# Altium PCB PCB_Emergencia_Rute.PcbDoc
Units mm, origin at the board's own origin, x right, y up, seen from the top; angles counter-clockwise.
Board outline 64.01 x 70.1 mm, 2 copper layers (Top Layer, Bottom Layer); 72 components, 52 nets, 238 pads, 46 vias.
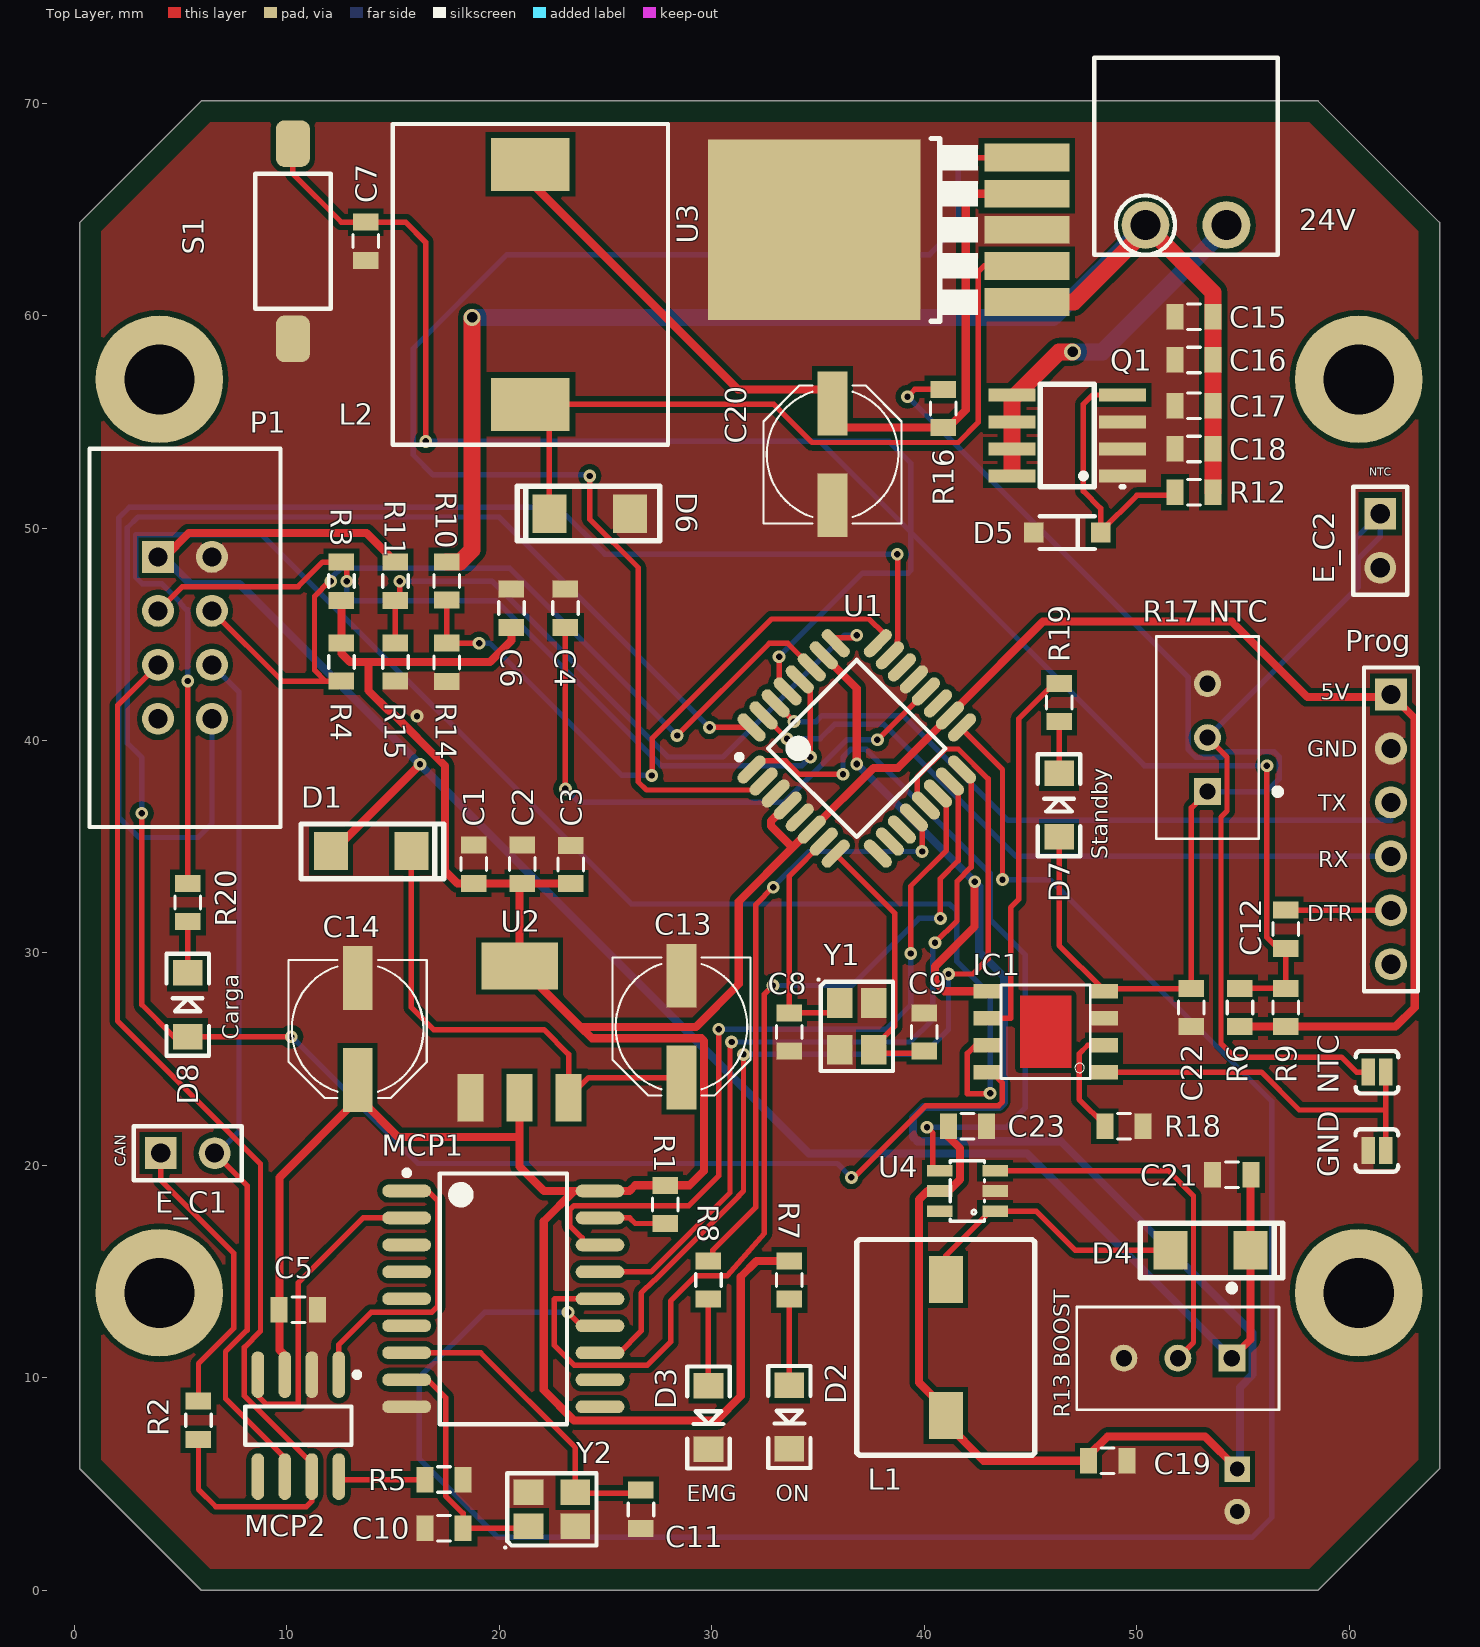
[diagram p0: Top Layer view]
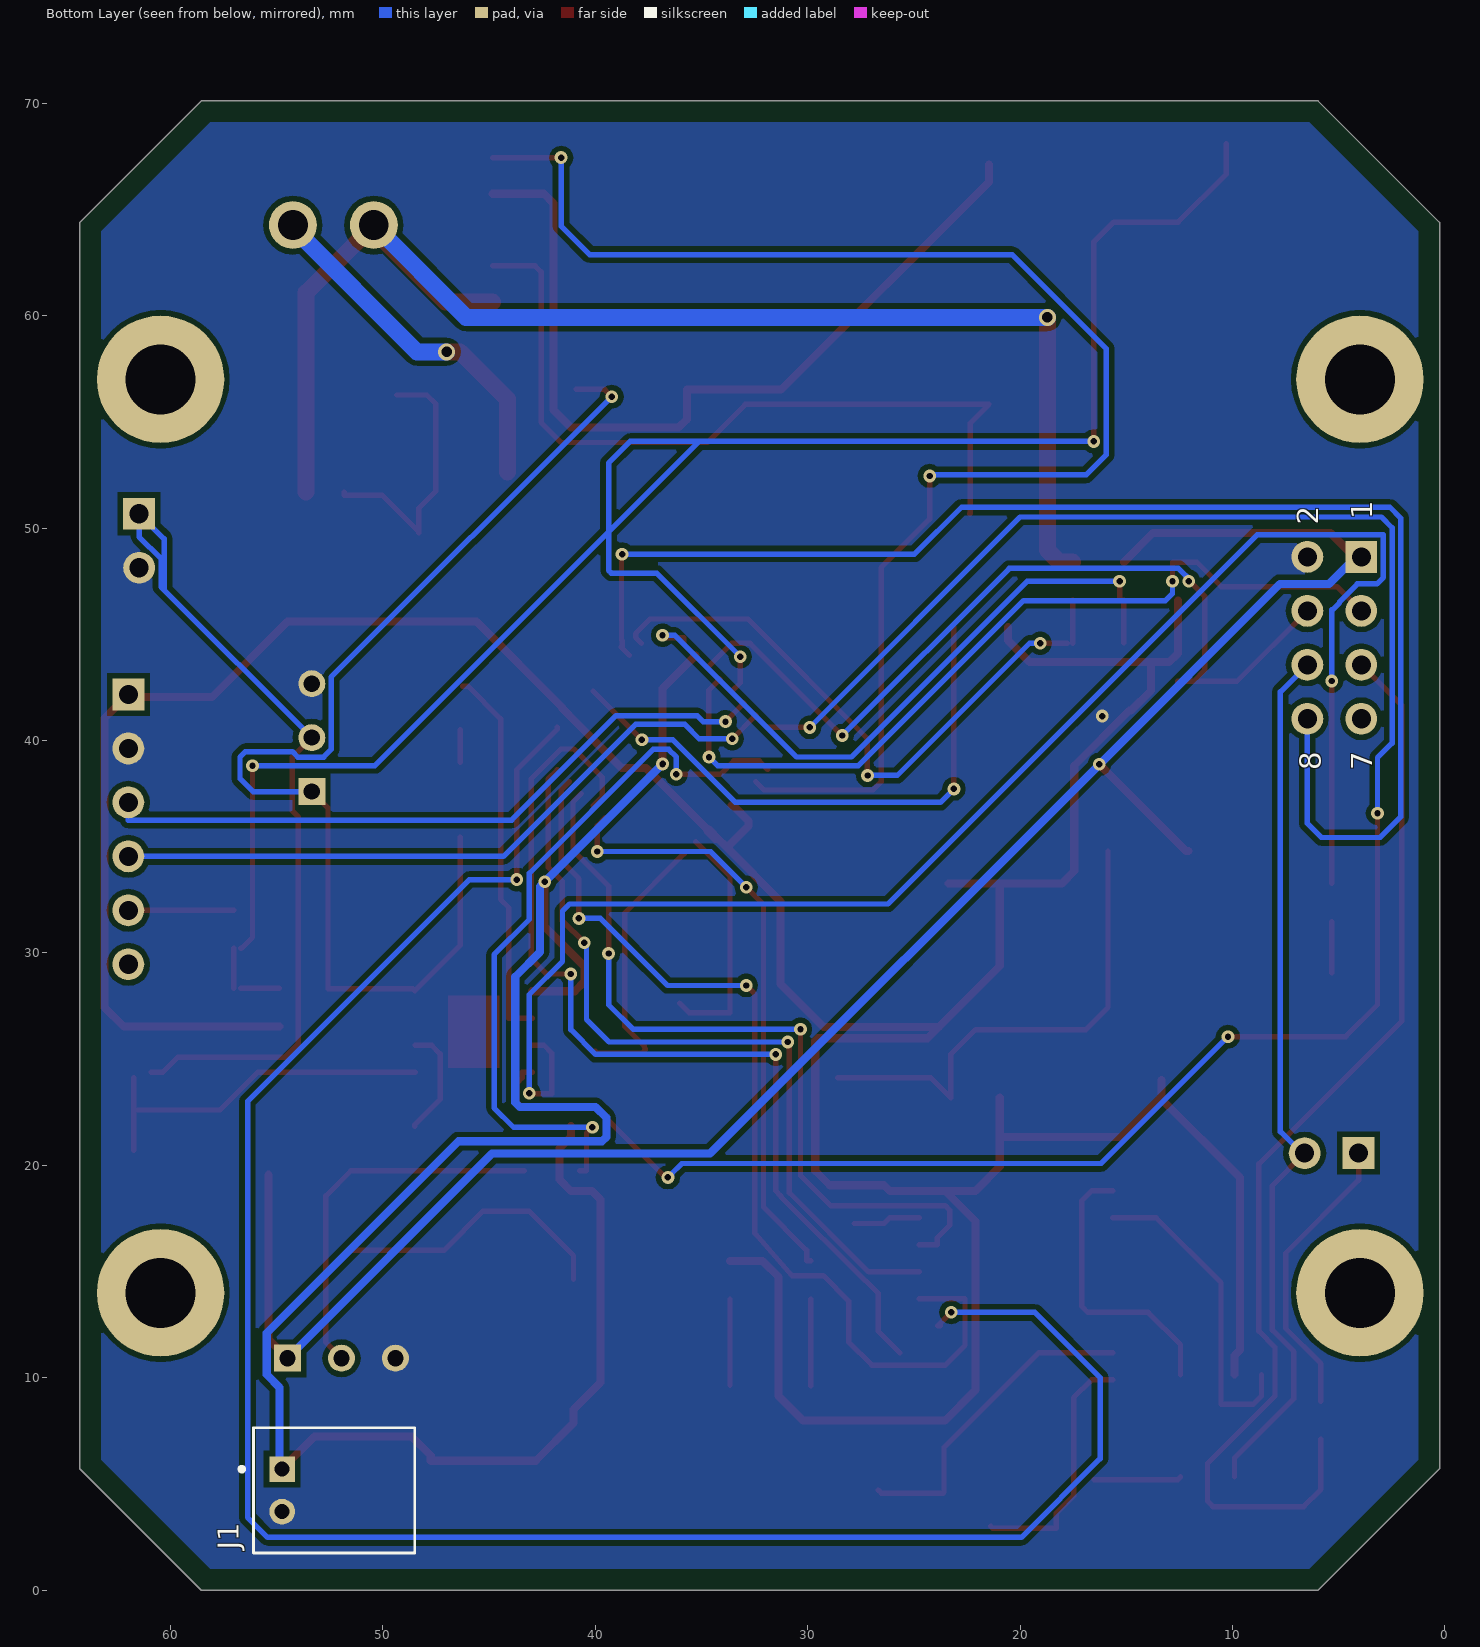
[diagram p1: Bottom Layer view, seen from below]
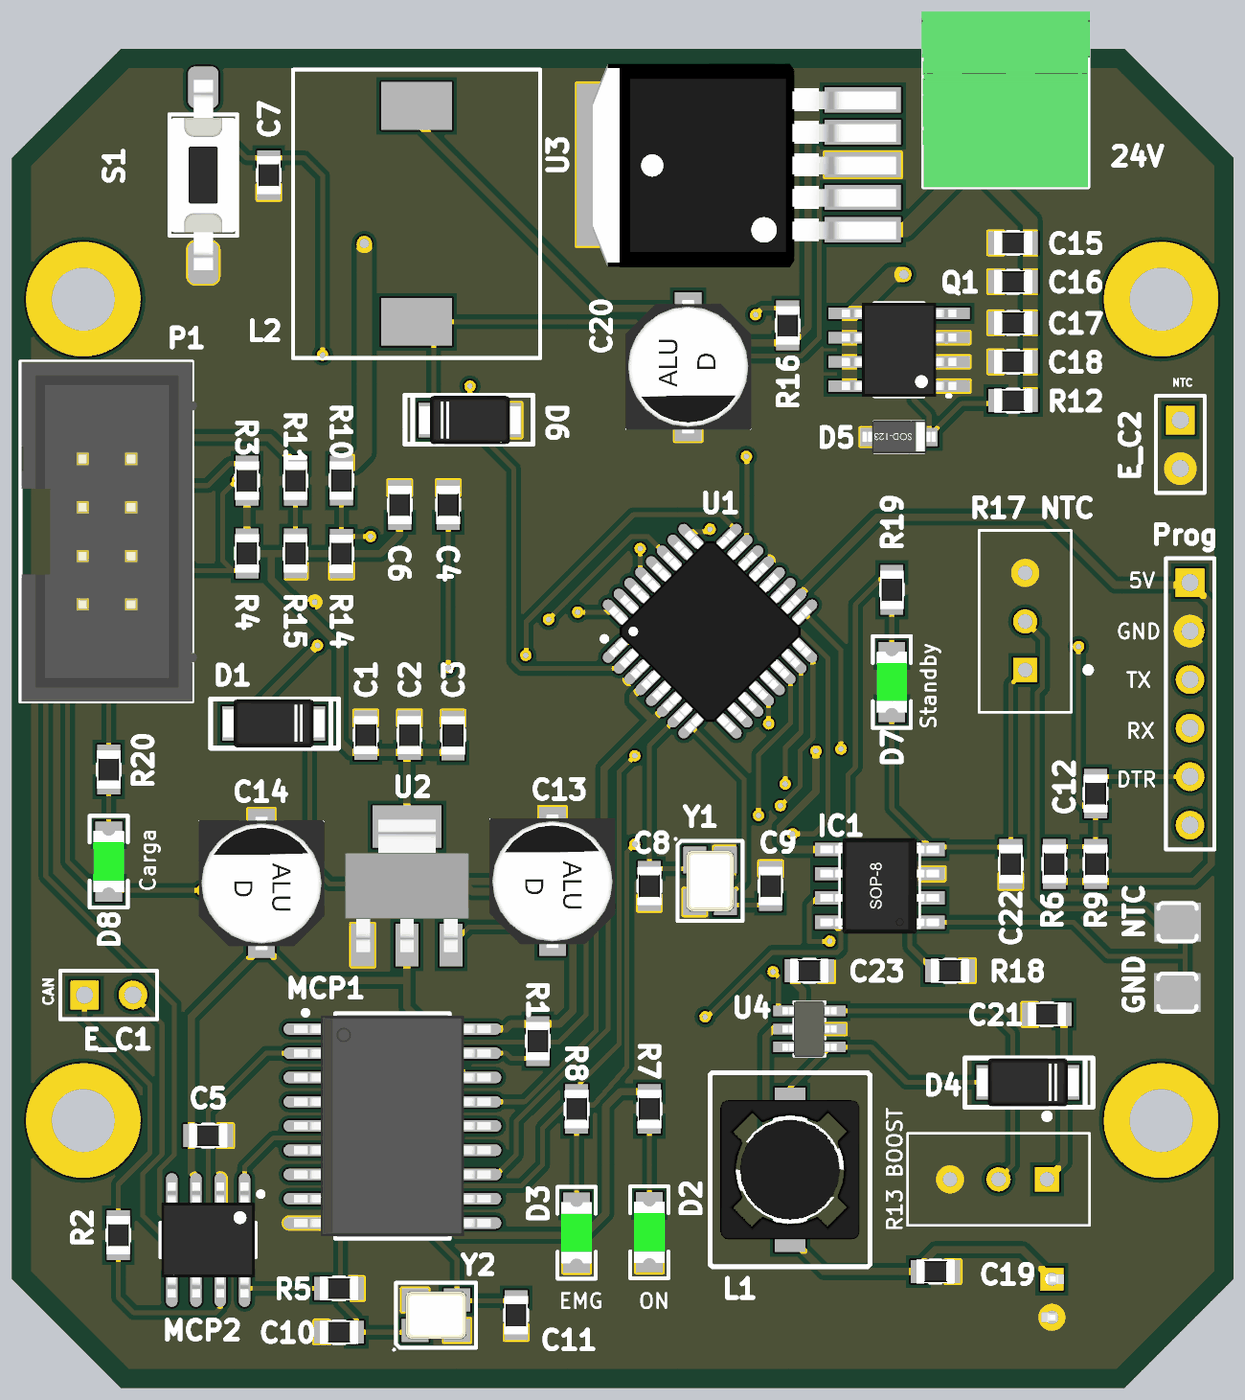
[diagram p2: 3D render of the assembled board from above, using the file's embedded part models]

## Layer stack, top to bottom
Top Solder: solder mask 0.0102, Solder Resist, Dk 3.5
Top Layer: signal copper 0.0356
Dielectric 1: dielectric 0.32, FR-4, Dk 4.8
Bottom Layer: signal copper 0.0356
Bottom Solder: solder mask 0.0102, Solder Resist, Dk 3.5

## Board outline
0.254,5.715 5.969,0 58.547,0 64.262,5.715 64.262,64.389 58.547,70.104 5.969,70.104 0.254,64.389

## Design rules (kind name [scope] priority, off if disabled: settings)
BoardOutlineClearance [All] p1: gap=1 ignorepadtopadclearanceinfootprint=FALSE
Clearance Clearance_2 [InNamedPolygon('GND TOP PLANE')] p1: gap=0.254 ignorepadtopadclearanceinfootprint=FALSE except(0: Arc-Hole Track-Hole SMDPad-Hole THPad-Hole Via-Hole Fill-Hole Poly-Hole Region-Hole Text-Hole)
Clearance Clearance_1 [InNamedPolygon('GND BOTTOM PLANE')] p2: gap=0.254 ignorepadtopadclearanceinfootprint=FALSE except(0: Arc-Hole Track-Hole SMDPad-Hole THPad-Hole Via-Hole Fill-Hole Poly-Hole Region-Hole Text-Hole)
Clearance Clearance_POWER [InNet('24V') vs InNet('GND')] p3: gap=0.381 ignorepadtopadclearanceinfootprint=FALSE
Clearance [All] p4: gap=0.152 ignorepadtopadclearanceinfootprint=FALSE
HoleSize [All] p1: absolutevalues=TRUE maxlimit=6.3 minlimit=0.3 maxpercent=80.000 minpercent=20.000
PlaneClearance [All] p1: clearance=5.016
PlaneConnect [All] p1: planeconnectstyle=Relief reliefexpansion=0.508 reliefentries=4 reliefconductorwidth=0.381 reliefairgap=-0.05
PolygonConnect [All] p1: connectstyle=Relief reliefconductorwidth=0.254 reliefentries=4 polygonreliefangle="90 Angle" airgapwidth=-0.05
RoutingVias RoutingVias_24V [InNet('24V')] p1: holewidth=0.5 width=0.8 viastyle="Through Hole" minholewidth=0.3 minwidth=0.6 maxholewidth=1 maxwidth=1.2
RoutingVias RoutingVias_GNDC [InNet('GNDC')] p2: holewidth=0.5 width=0.8 viastyle="Through Hole" minholewidth=0.3 minwidth=0.6 maxholewidth=1 maxwidth=1.2
RoutingVias [All] p3: holewidth=0.3 width=0.6 viastyle="Through Hole" minholewidth=0.3 minwidth=0.6 maxholewidth=1 maxwidth=1.2
SMDNeckDown [All] p1: percent=150.000
SolderMaskExpansion [All] p1: expansion=0.102
Width Width_24V [InNet('24V')] p1: maxlimit=0.889 minlimit=0.7 preferedwidth=0.8
Width Width_GNDC [InNet('GNDC')] p2: maxlimit=0.889 minlimit=0.6 preferedwidth=0.8
Width Width_GND [InNet('GND')] p3: maxlimit=0.508 minlimit=0.254 preferedwidth=0.381 checkconnectedcopper=TRUE
Width Width_9V [InNet('9V')] p4: maxlimit=0.508 minlimit=0.254 preferedwidth=0.381 checkconnectedcopper=TRUE
Width Width_5V [InNet('5V')] p5: maxlimit=0.381 minlimit=0.254 preferedwidth=0.381 checkconnectedcopper=TRUE
Width Width_3.7V [InNet('BAT')] p6: maxlimit=0.381 minlimit=0.254 preferedwidth=0.381 checkconnectedcopper=TRUE
Width Width_5VBuck [InNet('5VBUCK')] p7: maxlimit=0.381 minlimit=0.254 preferedwidth=0.381 checkconnectedcopper=TRUE
Width [All] p8: maxlimit=0.508 minlimit=0.254 preferedwidth=0.254
27 further rules are at their usual default settings.

## Components (designator, comment, footprint, x,y, rotation, side; value= is the part's Value field where it differs from the comment)
24V "20020110-D021A01LF" "FCI 06-381-2PIN" 52.324,67.564 r0 top (schematic designator 1)
C1 "CapacitorStandard 0603 ceramic capacitor, and 0.1\" leaded capacitor." 0805 18.796,34.174 r270 top
C2 "CapacitorStandard 0603 ceramic capacitor, and 0.1\" leaded capacitor." 0805 21.082,34.174 r270 top
C3 "CapacitorStandard 0603 ceramic capacitor, and 0.1\" leaded capacitor." 0805 23.368,34.163 r270 top
C4 "CapacitorStandard 0603 ceramic capacitor, and 0.1\" leaded capacitor." 0805 23.114,46.228 r270 top
C5 "CapacitorStandard 0603 ceramic capacitor, and 0.1\" leaded capacitor." 0805 10.541,13.208 r180 top
C6 "CapacitorStandard 0603 ceramic capacitor, and 0.1\" leaded capacitor." 0805 20.574,46.228 r270 top
C7 "CapacitorStandard 0603 ceramic capacitor, and 0.1\" leaded capacitor." 0805 13.716,63.5 r90 top
C8 "CapacitorStandard 0603 ceramic capacitor, and 0.1\" leaded capacitor." 0805 33.655,26.278 r90 top
C9 "CapacitorStandard 0603 ceramic capacitor, and 0.1\" leaded capacitor." 0805 40.005,26.278 r90 top
C10 "CapacitorStandard 0603 ceramic capacitor, and 0.1\" leaded capacitor." 0805 17.399,2.921 r0 top
C11 "CapacitorStandard 0603 ceramic capacitor, and 0.1\" leaded capacitor." 0805 26.67,3.81 r270 top
C12 "CapacitorStandard 0603 ceramic capacitor, and 0.1\" leaded capacitor." 0805 57.023,31.115 r270 top
C13 "47u" PANASONIC_D 28.575,26.53 r270 top
C14 "47u" PANASONIC_D 13.335,26.416 r270 top
C15 "CapacitorStandard 0603 ceramic capacitor, and 0.1\" leaded capacitor." 0805 52.705,59.944 r0 top
C16 "CapacitorStandard 0603 ceramic capacitor, and 0.1\" leaded capacitor." 0805 52.705,57.912 r0 top
C17 "CapacitorStandard 0603 ceramic capacitor, and 0.1\" leaded capacitor." 0805 52.705,55.753 r0 top
C18 "CapacitorStandard 0603 ceramic capacitor, and 0.1\" leaded capacitor." 0805 52.705,53.721 r0 top
C19 "CapacitorStandard 0603 ceramic capacitor, and 0.1\" leaded capacitor." 0805 48.641,6.096 r0 top
C20 "4.7u" PANASONIC_D 35.687,53.467 r90 top
C21 "CapacitorStandard 0603 ceramic capacitor, and 0.1\" leaded capacitor." 0805 54.483,19.558 r180 top
C22 "CapacitorStandard 0603 ceramic capacitor, and 0.1\" leaded capacitor." 0805 52.578,27.432 r270 top
C23 "CapacitorStandard 0603 ceramic capacitor, and 0.1\" leaded capacitor." 0805 42.037,21.844 r0 top
D1 "SS26FL" SS26FL 13.97,34.798 r180 top
D2 "LED Encendido" LED-1206 33.655,8.152 r270 top
D3 "LED Parada" LED-1206 29.845,8.128 r270 top
D4 "SS26FL" SS26FL 53.48,16.002 r180 top
D5 "13V Zener MM1Z13" SOD-123 46.736,49.784 r180 top
D6 "SS26FL" SS26FL 24.257,50.673 r0 top
D7 "LED Standby" LED-1206 46.355,36.957 r90 top
D8 "LED Carga" LED-1206 5.334,27.559 r90 top
E_C1 "Header 2" HDR1X2 4.064,20.574 r0 top
E_C2 "Header 2" HDR1X2 61.468,50.673 r270 top
GND "JUMPER-PAD-2-NC_BY_PASTE" PAD-JUMPER-2-NC_BY_PASTE_YES_SILK 61.309,20.701 r0 top (schematic designator JP2)
IC1 "TP4056" *SOP-8 45.72,26.289 r180 top
J1 "Conector JST" *JST_S2B-PH-K-S(LF)(SN) 54.737,4.699 r90 bottom
L1 "CDRH74" CDRH74 41.021,11.43 r90 top value=22uH
L2 "SMMS1360" "SMMS1360 - duplicate" 21.463,61.468 r90 top value=68uH
MCP1 "MCP2515T-I/SO" SOIC-SO18_N 20.193,13.716 r0 top
MCP2 "MCP2551T-I/SN" SOIC-SN8_N 10.541,7.747 r270 top
NTC "JUMPER-PAD-2-NC_BY_PASTE" PAD-JUMPER-2-NC_BY_PASTE_YES_SILK 61.321,24.384 r180 top (schematic designator JP1)
P1 "IDC2X4" IDC2X4 5.207,44.831 r270 top
Prog "Header 6" HDR1X6 61.976,42.164 r270 top (schematic designator Prog1)
Q1 "IRF7832TRPBF" SO-08 46.736,54.356 r90 top
R1 "ResistorBasic schematic elements and footprints for 0603, 1206, and PTH resistors." 0805 27.813,18.161 r270 top
R2 "ResistorBasic schematic elements and footprints for 0603, 1206, and PTH resistors." 0805 5.842,8.001 r90 top
R3 "ResistorBasic schematic elements and footprints for 0603, 1206, and PTH resistors." 0805 12.573,47.498 r270 top
R4 "ResistorBasic schematic elements and footprints for 0603, 1206, and PTH resistors." 0805 12.573,43.688 r90 top
R5 "ResistorBasic schematic elements and footprints for 0603, 1206, and PTH resistors." 0805 17.399,5.207 r180 top
R6 "ResistorBasic schematic elements and footprints for 0603, 1206, and PTH resistors." 0805 54.864,27.432 r270 top
R7 "ResistorBasic schematic elements and footprints for 0603, 1206, and PTH resistors." 0805 33.655,14.605 r90 top
R8 "ResistorBasic schematic elements and footprints for 0603, 1206, and PTH resistors." 0805 29.845,14.605 r90 top
R9 "ResistorBasic schematic elements and footprints for 0603, 1206, and PTH resistors." 0805 57.023,27.432 r90 top
R10 "ResistorBasic schematic elements and footprints for 0603, 1206, and PTH resistors." 0805 17.526,47.509 r90 top
R11 "ResistorBasic schematic elements and footprints for 0603, 1206, and PTH resistors." 0805 15.113,47.498 r90 top
R12 "20K" 0805 52.705,51.689 r0 top
"R13 BOOST" "3296W" 3296W 51.943,10.922 r270 top value=20k (schematic designator R13)
R14 "ResistorBasic schematic elements and footprints for 0603, 1206, and PTH resistors." 0805 17.526,43.677 r90 top
R15 "ResistorBasic schematic elements and footprints for 0603, 1206, and PTH resistors." 0805 15.113,43.688 r90 top
R16 "ResistorBasic schematic elements and footprints for 0603, 1206, and PTH resistors." 0805 40.894,55.626 r270 top
"R17 NTC" "3296W" 3296W 53.34,40.132 r180 top value=20k (schematic designator R17)
R18 "ResistorBasic schematic elements and footprints for 0603, 1206, and PTH resistors." 0805 49.403,21.844 r180 top
R19 "ResistorBasic schematic elements and footprints for 0603, 1206, and PTH resistors." 0805 46.355,41.783 r270 top
R20 "ResistorBasic schematic elements and footprints for 0603, 1206, and PTH resistors." 0805 5.334,32.374 r270 top
S1 "FSMSMTR" "TE FSMSMTR" 10.287,63.5 r0 top
U1 "ATmega328-AU" 32A_N 36.83,39.624 r45 top
U2 "NCP1117" SOT223 20.955,26.289 r0 top
U3 "LM2596S" LM2596S 34.831,64.037 r90 top
U4 "MT3608" *SOT23-6 42.037,18.796 r90 top
Y1 "16MHz" "NDK NX3225SA" 36.83,26.543 r270 top
Y2 "16MHz" "NDK NX3225SA" 22.479,3.81 r0 top

## Footprints (in the part's own frame and the unit in brackets; to place one, negate y for a bottom-side part, rotate by r counter-clockwise, add the part's x,y. Pads: shape width x height; smd on the part's side, far side on the other; paste and mask are expansions set on the pad)
32A_N [mm] "Thin QFP, 32-Leads, Body 7x7mm, Pitch 0.8mm, IPC Medium Density"
  oval 1.65x0.55 smd: 1(-4.2,2.8) 2(-4.2,2) 3(-4.2,1.2) 4(-4.2,0.4) 5(-4.2,-0.4) 6(-4.2,-1.2) 7(-4.2,-2) 8(-4.2,-2.8) 17(4.2,-2.8) 18(4.2,-2) 19(4.2,-1.2) 20(4.2,-0.4) 21(4.2,0.4) 22(4.2,1.2) 23(4.2,2) 24(4.2,2.8)
  oval 0.55x1.65 smd: 9(-2.8,-4.2) 10(-2,-4.2) 11(-1.2,-4.2) 12(-0.4,-4.2) 13(0.4,-4.2) 14(1.2,-4.2) 15(2,-4.2) 16(2.8,-4.2) 25(2.8,4.2) 26(2,4.2) 27(1.2,4.2) 28(0.4,4.2) 29(-0.4,4.2) 30(-1.2,4.2) 31(-2,4.2) 32(-2.8,4.2)
  silkscreen extent -4.32,-2.95 2.95,3.75, body extent -4.52,-4.53 4.5,4.5, height 1.15
0805 [mil]
  rect 31.5x47.24 smd: 1(-35.43,0) 2(35.43,0)
  silkscreen extent -12,-24 12,24, body extent -39,-25 39,25, height 20
3296W [mm]
  rect 1.268x1.268 hole 0.76: 1(0,2.54)
  round 1.268 hole 0.76: 2(0,0) 3(0,-2.54)
  silkscreen extent -3.4,-4.76 2.42,4.76, body extent -2.41,-4.76 2.42,4.77, height 11.55
*JST_S2B-PH-K-S(LF)(SN) [mm]
  rect 1.208x1.208 hole 0.7: 1(1,0)
  round 1.208 hole 0.7: 2(-1,0)
  silkscreen extent -2.95,-6.25 2.95,2, body extent -2.95,-6.2 2.95,1.4, height 4.8
*SOP-8 [mm]
  rect 1.3x0.7 smd: 1(-2.75,1.905) 2(-2.75,0.635) 3(-2.75,-0.635) 4(-2.75,-1.905) 5(2.75,-1.905) 6(2.75,-0.635) 7(2.75,0.635) 8(2.75,1.905)
  Top Layer region: -1.2,1.7 1.2,1.7 1.2,-1.7 -1.2,-1.7
  silkscreen extent -2.1,-2.2 2.1,2.2, body extent -3.11,-2.5 3.11,2.5, height 1.87
*SOT23-6 [mm]
  rect 0.55x1.2 smd: 1(-0.95,-1.3) 2(0,-1.3) 3(0.95,-1.3) 4(0.95,1.3) 5(0,1.3) 6(-0.95,1.3)
  silkscreen extent -1.42,-0.81 1.42,0.81, body extent -1.46,-1.42 1.46,1.42, height 1.1
CDRH74 [mm]
  rect 2.2x1.6 smd: 1(-3.2,0) 2(3.2,0)
  silkscreen extent -5.08,-4.19 5.08,4.19, body extent -3.65,-3.65 3.65,3.65, height 4.49
"FCI 06-381-2PIN" [mm] "FCI Pluggable Terminal Block"
  round 2.25 hole 1.4: 1(-1.905,-3.302) 2(1.905,-3.302)
  silkscreen extent -4.32,-4.7 4.32,4.57, body extent -4.4,-4.7 4.4,4.5, height 7.6
HDR1X2 [mm] "Connector; Header; 2 Position"
  rect 1.5x1.5 hole 0.9: 1(0,0)
  round 1.5 hole 0.9: 2(2.54,0)
  silkscreen extent -1.27,-1.27 3.81,1.27
HDR1X6 [mm] "Connector; Header; 6 Position"
  rect 1.5x1.5 hole 0.9: 1(0,0)
  round 1.5 hole 0.9: 2(2.54,0) 3(5.08,0) 4(7.62,0) 5(10.16,0) 6(12.7,0)
  silkscreen extent -1.27,-1.27 13.97,1.27
IDC2X4 [mm] "IDC Connector 2x4"
  rect 1.5x1.5 hole 0.9: 1(-3.81,-1.27)
  round 1.5 hole 0.9: 2(-3.81,1.27) 3(-1.27,-1.27) 4(-1.27,1.27) 5(1.27,-1.27) 6(1.27,1.27) 7(3.81,-1.27) 8(3.81,1.27)
  silkscreen extent -8.9,-4.5 8.9,4.5, body extent -8.89,-4.45 8.89,4.76, height 9.01
LED-1206 [mm]
  rect 1.2x1.4 smd: A(-1.5,0) C(1.5,0)
  silkscreen extent -2.4,-1 2.4,1, body extent -1.6,-0.8 1.6,0.8, height 1.11
LM2596S [mm]
  rect 1.31x4 smd: 1(-3.4,-10) 2(-1.7,-10) 3(0,-10) 4(1.7,-10) 5(3.4,-10)
  rect 8.5x10 smd: 6(0,0)
  silkscreen extent -4.3,-7.7 4.3,-5.5, body extent -5.37,-11.74 5.3,4.14, height 4.57
"NDK NX3225SA" [mm] "Crystal, 4-Leads, Body 2.50x3.20mm, Pitch 2.20mm, IPC Medium Density"
  rect 1.4x1.2 smd: 1(-1.1,-0.8) 2(1.1,-0.8) 3(1.1,0.8) 4(-1.1,0.8)
  silkscreen extent -2.25,-1.85 2.1,1.7, body extent -1.61,-1.26 1.61,1.26, height 0.6
PAD-JUMPER-2-NC_BY_PASTE_YES_SILK [mm]
  rect 0.635x1.27 smd: 1(-0.401,0) 2(0.413,0)
  silkscreen extent -1,-1 1,1
PANASONIC_D [mm]
  rect 3x1.4 smd: +(2.4,0) -(-2.4,0)
  silkscreen extent -3.25,-3.25 3.25,3.25, body extent -3.5,-3.3 3.5,3.3, height 5.4
"SMMS1360 - duplicate" [mm]
  rect 2.5x3.7 smd: PS1(-5.65,0) PS2(5.65,0)
  silkscreen extent -7.55,-6.48 7.55,6.48, body extent -6.67,-5.71 6.67,5.72, height 7
SO-08 [mm]
  rect 0.6x2.2 smd: 1(-1.905,-2.6) 2(-0.635,-2.6) 3(0.635,-2.6) 4(1.905,-2.6) 5(1.905,2.6) 6(0.635,2.6) 7(-0.635,2.6) 8(-1.905,2.6)
  silkscreen extent -2.41,-2.67 2.41,1.27, body extent -2.45,-3 2.45,3, height 1.75
SOD-123 [mm]
  rect 0.9x0.95 smd: A(1.575,0) C(-1.575,0)
  silkscreen extent -1.3,-0.77 1.3,0.77, body extent -1.93,-0.86 1.92,0.84, height 1.46
SOIC-SN8_N [mm] "SOIC, 8-Leads, Body 4.9x3.8mm, Pitch 1.27mm, IPC Medium Density"
  oval 2.2x0.6 smd: 1(-2.4,1.905) 2(-2.4,0.635) 3(-2.4,-0.635) 4(-2.4,-1.905) 5(2.4,-1.905) 6(2.4,-0.635) 7(2.4,0.635) 8(2.4,1.905)
  silkscreen extent -2.52,-2.5 0.9,2.88, body extent -3,-2.45 3,2.45, height 1.75
SOIC-SO18_N [mm] "SOIC, 18-Leads, Body 11.5x7.5mm, Pitch 1.27mm, IPC Medium Density"
  oval 2.3x0.6 smd: 1(-4.55,5.08) 2(-4.55,3.81) 3(-4.55,2.54) 4(-4.55,1.27) 5(-4.55,0) 6(-4.55,-1.27) 7(-4.55,-2.54) 8(-4.55,-3.81) 9(-4.55,-5.08) 10(4.55,-5.08) 11(4.55,-3.81) 12(4.55,-2.54) 13(4.55,-1.27) 14(4.55,0) 15(4.55,1.27) 16(4.55,2.54) 17(4.55,3.81) 18(4.55,5.08)
  silkscreen extent -4.67,-5.9 3,6.05, body extent -5.15,-5.77 5.15,5.76, height 2.65
SOT223 [mil]
  rect 48x88 smd: 1(-91,-122) 2(0,-122) 3(91,-122)
  rect 141.73x86.61 smd: 4(0,122.01)
  body extent -128,-136 128,136, height 63
SS26FL [mil]
  rect 63x71 smd: A(74.5,0) C(-74.5,0)
  silkscreen extent -134,-50 130,51, body extent -104,-50 104,50, height 39
"TE FSMSMTR" [mm]
  rrect50% 1.6x2.19 smd: 1(0,4.595) 2(0,-4.595)
  silkscreen extent -1.78,-3.17 1.78,3.17, body extent -1.75,-4.98 1.75,4.98, height 4.42

## Part data
24V: "TERM BLOCK HDR 2POS R/A 3.81MM", Colour=Green, Manufacturer=FCI, Supplier Part Number 1=609-3819-ND, TemperatureRange="-40C ~ 115C", Voltage=300V, ComponentLink1Description=Datasheet, ComponentLink1URL=http://portal.fciconnect.com/Comergent//fci/drawing/20020110.pdf, ComponentLink2Description="Digi-Key Listing", ComponentLink2URL=http://www.digikey.ca/product-detail/en/20020110-D021A01LF/609-3819-ND/2261255, Number Of Levels=1, Number Of Positions=2, Orientation="90, Right Angle", PartId=7785, Part Number=20020110-D021A01LF, Pitch="0.150\" (3.81mm)", Positions Per Level=2, Price=0,75, Supplier 1=Digi-Key, Type="Through Hole"
C1 C2 C3 C4 C5 C6 C7 C8 C9 C10 C11 C12 C15 C16 C17 C18 C19 C21 C22 C23: library part CAP0805
  C1 C2 C3 C4 C5 C6 C12: Cap=100n
  C7 C8 C9 C10 C11: Cap=22p
  C15 C16 C17 C18 C22 C23: Cap=10u
  C19 C21: Cap=22u
C13 C14 C20: library part 47UF-50V-20%(ELECT), PROD_ID=CAP-10547
D2 D3 D7 D8: library part LED1206
D5: library part DIODE-ZENER16V, PROD_ID=DIO-12440
E_C1 E_C2: "Header, 2-Pin", LatestRevisionDate=17-Jul-2002, LatestRevisionNote="Re-released for DXP Platform.", Publisher="Altium Limited"
IC1: Package="Package Analog Devices", Availability=Unavailable, MF="NanJing Top Power ASIC Corp.", MP=TP4056, Price=None, SnapEDA_Link=https://www.snapeda.com/parts/TP4056%20/NanJing%20Top%20Power%20ASIC%20Corp./view-part/?ref=snap
J1: library part S2B-PH-K-S(LF)(SN), "PH Series 2 Position 2.0 mm Through Hole Side Entry Shrouded Header", Package=None, Availability=Unavailable, MF="JST Sales", MP=S2B-PH-K-S_LF__SN_, Price=None, SnapEDA_Link=https://www.snapeda.com/parts/S2B-PH-K-S%28LF%29%28SN%29/JST%20Sales%20America%20Inc./view-part/?ref=snap
L2: library part INDUCTOR
MCP1: "Stand-Alone CAN Controller With SPI Interface, 18-Pin SOIC, Industrial Temperature, Tape and Reel", Supplier Part Number 1=MCP2515T-I/SO-ND, Code_JEDEC=MS-013, ComponentLink1Description=Datasheet, ComponentLink1URL=http://ww1.microchip.com/downloads/en/DeviceDoc/21801e.pdf, ComponentLink2Description="Packaging Specification", ComponentLink2URL=http://www.microchip.com/stellent/groups/techpub_sg/documents/packagingspec/en012702.pdf, ComponentLink3Description="Microchip.com Home", ComponentLink3URL=http://www.microchip.com/, DatasheetVersion="revE, Nov-2007", PackageDescription="18-Lead Plastic Small Outline (SO) - Wide 7.50mm Body [SOIC]", PackageReference=SOIC-SO18, PackageVersion="revBB, Aug-2009", Published=29-Jan-2009, Publisher="Altium Limited", Supplier 1=Digi-Key, Supplier 2=Farnell, Supplier Part Number 2=1815922
MCP2: "High-Speed CAN Transceiver, 8-Pin SOIC, Industrial Temperature, Tape and Reel", Supplier Part Number 1=MCP2551T-I/SNTR-ND, Code_IPC=SOIC127P600-8, Code_JEDEC=MS-012, ComponentLink1Description=Datasheet, ComponentLink1URL=http://ww1.microchip.com/downloads/en/DeviceDoc/21667E.pdf, ComponentLink2Description="Packaging Specification", ComponentLink2URL=http://www.microchip.com/stellent/groups/techpub_sg/documents/packagingspec/en012702.pdf, ComponentLink3Description="Microchip.com Home", ComponentLink3URL=http://www.microchip.com/, DatasheetVersion="revE, Jan-2007", PackageDescription="8-Lead Plastic Small Outline (SN) - Narrow, 3.90mm Body [SOIC]", PackageReference=SOIC-SN8, PackageVersion="revBB, Aug-2009", Published=29-Jan-2009, Publisher="Altium Limited", Supplier 1=Digi-Key, Supplier 2=Farnell, Supplier Part Number 2=1788569
P1: "Header, 4-Pin, Dual row", LatestRevisionDate=17-Jul-2002, LatestRevisionNote="Re-released for DXP Platform.", Publisher="Altium Limited"
Prog: "Header, 6-Pin", LatestRevisionDate=17-Jul-2002, LatestRevisionNote="Re-released for DXP Platform.", Publisher="Altium Limited"
Q1: library part N-MOSFET-SO8S
R1 R2 R3 R4 R5 R6 R7 R8 R9 R10 R11 R12 R14 R15 R16 R18 R19 R20: library part RESISTOR0805-RES
  R1 R6 R9 R14 R15: Res=10K
  R2: Res=124
  R3 R4: Res=0
  R5: Res=4.7K
  R7 R8 R19 R20: Res=560
  R10: Res=47K
  R11: Res=10k
  R16: Res=0.4
  R18: Res=1.2K
S1: "SWITCH TACTILE SPST-NO 0.05A 24V", Contact Rating @ Voltage="0.05A @ 24VDC", Illumination Type, Colour=-, Manufacturer="TE Connectivity Alcoswitch Switches", Operating Force=180gf, Operating Temperature="-35C ~ 85C", Supplier Part Number 1=450-1758-2-ND, Actuator Orientation="Top Actuated", Actuator Type=Standard, Circuit=SPST-NO, ComponentLink1Description=Datasheet, ComponentLink1URL=http://www.te.com/commerce/DocumentDelivery/DDEController?Action=srchrtrv&DocNm=1437566-3&DocType=Customer+Drawing&DocLang=English, ComponentLink2Description="Digi-Key Listing", ComponentLink2URL=http://www.digikey.com/product-detail/en/FSMSMTR/450-1758-2-ND/529671, Illumination=Non-Illuminated, Illumination Voltage=-, Mechanical Life="20,000 Cycles", PartId=8251, Part Number=FSMSMTR, Price=0,175, Supplier 1=Digi-Key, Switch Function=Off-Mom, Switch Travel=0.25mm
U1: "8-bit AVR Microcontroller, 32KB Flash, 1KB EEPROM, 2KB SRAM, 32-pin TQFP, Industrial Grade (-40°C to 85°C)", Supplier Part Number 1=ATMEGA328-AU-ND, Code_JEDEC=MS-026-ABA, ComponentLink1Description="Manufacturer Link", ComponentLink1URL=http://www.atmel.com/products/avr/default.asp?, ComponentLink2Description="ATmega48A/48PA/88A/88PA/168A/168PA/328/328P Datasheet", ComponentLink2URL=http://www.atmel.com/dyn/resources/prod_documents/8271.pdf, ComponentLink3Description="ATmega48A/48PA/88A/88PA/168A/168PA/328/328P Summary", ComponentLink3URL=http://www.atmel.com/dyn/resources/prod_documents/8271S.pdf, ComponentLink4Description="Atmel.com Home", ComponentLink4URL=http://www.atmel.com, DatasheetVersion="revA, Jan-2010", PackageDescription="32-Lead, 7x7x1.0 mm Body, 0.8mm Lead Pitch, Thin Profile Plastic Quad Flat Package (TQFP)", PackageReference=32A, PackageVersion="revB, Oct-2001", Published=1-Apr-2010, Publisher="Altium Limited", Supplier 1=Digi-Key, Supplier 2=Mouser, Supplier Part Number 2=556-ATMEGA328-AU
U2: library part V_REG_LM1117SOT223, PROD_ID=VREG-08170
U3: "Semiconductors and Actives", Package=None, Availability=Unavailable, MF="Texas Instruments", MP=LM2596S, Price=None, SnapEDA_Link=https://www.snapeda.com/parts/LM2596S/Texas%20Instruments/view-part/?ref=snap
U4: "High Efficiency 1.2MHz / 2A Step Up Converter", Package="Package Analog Devices", Availability=Unavailable, MF="Aerosemi Technology Co., Ltd", MP=MT3608, Price=None, SnapEDA_Link=https://www.snapeda.com/parts/MT3608/Aerosemi%20Technology%20Co.%2C%20Ltd/view-part/?ref=snap
Y1 Y2: library part NX3225SA-16.000MHZ-STD-CSR-1, "CRYSTAL 16.0000MHZ 8PF SMD", Device Package="4-SMD, No Lead (DFN, LCC)", Frequency Stability=15ppm, Load Capacitance=8pF, Manufacturer=NDK, Operating Mode=Fundamental, Supplier Part Number 1=644-1049-2-ND, ComponentLink1Description=Datasheet, ComponentLink1URL=http://media.digikey.com/pdf/Data%20Sheets/NDK%20PDFs/NX3225SA.pdf, ComponentLink2Description="Digi-Key Listing", ComponentLink2URL=http://www.digikey.com/product-detail/en/NX3225SA-16.000MHZ-STD-CSR-1/644-1049-2-ND/1128831, ESR="80 Ohm", Frequency=16MHz, Frequency Tolerance=15ppm, PartId=8509, Part Number=NX3225SA-16.000MHZ-STD-CSR-1, Price=0,3799, Supplier 1=Digi-Key, Type="MHz Crystal"
D1 D4 D6: PROD_ID=SS26FL

## Free pads (board coordinates)
  round 6 hole 3.3: 1(4,57) 2(60.46,57) 3(4,14) 4(60.46,14)

## Via types
v1: diameter 0.6, hole 0.3, Top Layer to Bottom Layer, 44 vias
v2: diameter 0.8, hole 0.5, Top Layer to Bottom Layer, 2 vias

## Nets (pads, with @x,y where several pads share a name; then routed paths per layer and width w, separated by ;. In a path a pad name is that pad's centre, name@x,y a point inside that pad or via, vN(x,y) a via of type N, cw(c..) or ccw(c..) an arc to the next point about the centre after c; other vN are vias at no path point)
5V: C1.2 C2.2 C3.2 C5.2 C6.2 C14.+ MCP1.18 MCP2.3 Prog.1 R1.1 R3.2 R4.2 R6.2 R7.2 R9.1 U1.4 U1.6 U1.18 U2.2 U2.4 | length 191.7
  Top Layer w0.381: MCP2.3 9.906,11.049 9.652,11.303 9.652,19.431 13.335,23.114 13.462,23.114 15.24,21.336 20.955,21.336 ; R3.2 R4.2 12.573,44.094 12.979,43.688 13.843,43.688 ; C14.+@13.335,23.241 C14.+ ; C6.2 20.574,44.704 19.558,43.688 13.843,43.688 ; U2.2 20.955,21.336 ; C3.2 22.211,33.263 22.2,33.274 C2.2 C2.2@20.955,33.274 ; U1.4 33.508,36.937 32.787,36.216 32.787,35.966 33.799,34.954 ; R7.2 32.117,15.505 31.369,14.757 31.369,9.136 30.226,7.993 23.52,7.993 22.092,9.421 22.092,17.368 23.52,18.796 ; R6.2 R9.1 62.194,26.532 63.094,27.432 63.094,41.046 Prog.1@62.103,42.037 ; Prog.1 Prog.1@62.103,42.037 ; 13.843,43.688 13.843,42.343 14.783,41.403 14.858,41.403 17.45,38.811 17.45,33.858 18.034,33.274 C1.2 C2.2@20.955,33.274 ; 20.955,21.336 20.955,19.939 22.098,18.796 23.52,18.796 ; C2.2@20.955,33.274 U2.4 23.825,26.518 ; 23.52,18.796 MCP1.18 26.137,18.796 26.402,19.061 R1.1 28.96,19.061 29.642,19.743 29.642,25.857 29.515,25.984 24.359,25.984 23.825,26.518 ; 23.825,26.518 29.261,26.518 31.273,28.53 31.273,32.428 33.799,34.954 ; 33.799,34.954 U1.6@34.209,35.365 ; U1.6@34.209,35.365 34.349,35.365 34.709,35.725 U1.6 ; U1.6@34.209,35.365 34.65,35.806 U1.6 ; U1.6 37.613,38.71 38.76,38.71 41.214,41.163 U1.18 41.563,41.529 41.563,41.563 45.593,45.593 54.483,45.593 58.039,42.037 Prog.1@62.103,42.037
5VBUCK: C20.+ L2.PS2 R16.2 U3.4 | length 40.1
  Top Layer w0.381: L2.PS2 21.463,66.294 31.242,56.515 35.687,56.515 C20.+ 35.687,55.118 36.079,54.726 R16.2 41.137,54.726 41.961,55.55 41.961,65.28 42.418,65.737 U3.4
9V: "R13 BOOST.1" C21.1 D1.A D4.C P1.1 R11.2 | length 93.4
  Top Layer w0.381: P1.1 4.267,48.641 5.385,49.759 13.752,49.759 R11.2 ; D1.A 12.192,34.798 v1(16.269,38.875) ; 54.483,10.922 55.372,11.811 D4.C 55.372,19.547 C21.1
  Bottom Layer w0.381: P1.1@3.556,48.514 P1.1@3.556,48.641 ; P1.1 4.191,48.641 5.461,47.371 7.774,47.371 v1(16.269,38.875) 34.589,20.556 44.849,20.556 54.483,10.922
24V: 24V.1 C15.2 C16.2 C17.2 C18.2 R10.2 R12.2 U3.1 | length 67
  Top Layer w0.8: R10.2 18.157,48.409 18.72,48.971 v2(18.72,59.919) ; U3.1 47.048,60.637 50.419,64.008 24V.1 53.594,61.087 ; R12.2 C18.2 C17.2 C16.2 C15.2 53.605,61.087
  Bottom Layer w0.8: v2(18.72,59.919) 46.076,59.919 24V.1
AREF: C4.2 U1.20 | length 27
  Top Layer w0.254: v1(23.114,37.719) C4.2 ; v1(37.801,40.03) U1.20
  Bottom Layer w0.254: v1(23.114,37.719) 23.749,37.084 33.401,37.084 36.347,40.03 v1(37.801,40.03)
BAT: C19.1 C23.1 IC1.5 J1.1 L1.1 U1.26 U4.5 | length 104.5
  Top Layer w0.381: U1.26 36.83,42.452 v1(36.83,38.887) ; C23.1 41.137,21.347 41.681,20.803 41.681,19.329 41.148,18.796 U4.5 40.157,18.796 39.751,18.39 39.751,9.779 41.021,8.509 L1.1 41.021,7.874 42.799,6.096 C19.1 47.741,6.339 48.641,7.239 53.213,7.239 54.737,5.715 J1.1 ; v1(42.38,33.347) 42.38,31.236 40.505,29.362 40.505,28.651 40.963,28.194 IC1.5
  Bottom Layer w0.381: v1(36.822,38.904) v1(42.38,33.347) ; v1(36.83,38.887) 42.596,33.122 42.596,30.048 43.764,28.88 43.764,22.962 43.553,22.751 39.98,22.751 39.472,22.243 39.472,21.336 39.675,21.133 46.431,21.133 55.46,12.104 55.46,10.146 54.864,9.551 54.864,5.699 J1.1
C_CS: MCP1.16 U1.14 | length 37.6
  Top Layer w0.254: MCP1.16 23.901,16.256 23.901,16.586 23.314,17.174 23.314,17.899 23.52,18.105 28.925,18.105 30.338,19.518 v1(30.338,26.409) ; v1(39.37,29.972) 39.37,33.147 41.046,34.823 41.046,37.105 U1.14
  Bottom Layer w0.254: v1(30.338,26.409) 38.22,26.409 39.37,27.559 v1(39.37,29.972)
CANH: MCP2.7 P1.5 R2.1 | length 52.7
  Top Layer w0.254: P1.5 2.032,41.656 2.032,26.797 8.763,20.066 8.763,12.192 8.001,11.43 8.001,9.144 11.176,5.969 MCP2.7 11.176,4.191 10.922,3.937 6.655,3.937 5.842,4.75 R2.1
CANL: E_C1.2 MCP2.6 P1.6 | length 41.8
  Top Layer w0.254: E_C1.2 8.128,19.05 8.128,12.243 7.112,11.227 7.112,9.017 9.906,6.223 MCP2.6
  Bottom Layer w0.254: P1.6@6.096,43.434 P1.6@6.477,43.434 ; P1.6 7.747,42.291 7.747,21.59 E_C1.2@6.731,20.574
CTAL1: C10.2 MCP1.8 Y2.1 | length 11.8
  Top Layer w0.254: MCP1.8 16.637,9.906 17.475,9.068 17.475,4.445 18.299,3.621 C10.2 21.29,2.921 Y2.1
CTAL2: C11.1 MCP1.7 Y2.3 | length 15.1
  Top Layer w0.254: MCP1.7 19.129,11.176 23.579,6.726 Y2.3 23.617,4.572 26.532,4.572 C11.1
EMG_9: R11.1 R15.2 U1.25 | length 31.7
  Top Layer w0.254: R15.2 R11.1 15.316,46.598 v1(15.316,47.498) ; U1.25 35.84,44.831 36.703,44.831 v1(36.83,44.958)
  Bottom Layer w0.254: v1(15.316,47.498) 19.66,47.498 27.935,39.222 30.524,39.222 36.26,44.958 v1(36.83,44.958)
EMG_24: R10.1 R14.2 U1.24 | length 29.9
  Top Layer w0.254: R14.2 R10.1 ; R14.2@17.78,44.577 v1(19.05,44.577) ; v1(27.178,38.354) 27.194,38.37 27.194,40.097 32.817,45.72 37.414,45.72 38.1,45.034 38.1,44.854 U1.24
  Bottom Layer w0.254: v1(19.05,44.577) 19.558,44.577 25.781,38.354 v1(27.178,38.354)
EN_BOOST: U1.1 U4.4 | length 34.2
  Top Layer w0.254: U1.1 32.286,39.04 33.477,39.04 34.112,38.405 v1(36.179,38.405) ; v1(40.132,21.793) 40.411,21.514 40.411,19.746 U4.4
  Bottom Layer w0.254: v1(36.179,38.405) 36.179,39.218 36.542,39.58 37.27,39.58 43.104,33.746 43.104,31.572 44.755,29.921 44.755,22.705 43.843,21.793 v1(40.132,21.793)
EN_BUCK: U1.2 U3.5 | length 69.9
  Top Layer w0.254: v1(24.257,52.451) 24.257,50.419 26.543,48.133 26.543,38.054 26.929,37.668 32.046,37.668 U1.2 ; v1(41.605,67.437) U3.5
  Bottom Layer w0.254: v1(24.257,52.451) 24.257,52.476 24.282,52.502 16.891,52.502 15.951,53.442 15.951,58.445 20.371,62.865 40.259,62.865 41.605,64.211 v1(41.605,67.437)
EN_CARGA: D8.A IC1.8 U1.32 | length 104
  Top Layer w0.254: v1(3.175,36.576) 3.175,27.559 4.675,26.059 D8.A v1(10.212,26.059) ; v1(29.901,40.614) U1.32 ; v1(36.576,19.431) 36.576,19.304 40.081,22.809 43.51,22.809 43.683,22.982 43.683,23.881 43.434,24.13 43.434,24.384 IC1.8
  Bottom Layer w0.254: v1(3.175,36.576) 3.175,39.192 2.489,39.878 2.489,50.013 2.997,50.521 19.994,50.521 v1(29.901,40.614) ; v1(10.212,26.059) 16.185,20.086 35.921,20.086 36.426,19.581 36.403,19.558 36.53,19.431 v1(36.576,19.431)
GND: "R13 BOOST.3" "R17 NTC.3" C1.1 C2.1 C3.1 C4.1 C5.1 C6.1 C7.1 C8.1 C9.2 C10.1 C11.2 C13.- C14.- C15.1 C16.1 C17.1 C18.1 C19.2 C20.- C21.2 C22.2 C23.2 D2.C D3.C D5.A D6.A E_C2.2 GND.1 IC1.3 J1.2 MCP1.9 MCP2.2 P1.2 Prog.2 Q1.1 Q1.2 Q1.3 R5.1 R14.1 R15.1 R18.1 S1.2 U1.3 U1.5 U1.21 U2.1 U3.3 U3.6 U4.2 Y1.2 Y1.4 Y2.2 Y2.4
  other v1: 16.129,41.148
GNDC: 24V.2 Q1.5 Q1.6 Q1.7 Q1.8 | length 17
  Top Layer w0.8: Q1.8@44.136,52.638 Q1.7 Q1.6 44.136,56.074 46.355,58.293 v2(46.99,58.293)
  Bottom Layer w0.8: v2(46.99,58.293) 48.387,58.293 54.229,64.135 24V.2
INT: MCP1.12 U1.13 | length 45.8
  Top Layer w0.254: MCP1.12@25.654,11.176 26.68,12.202 26.68,13.98 27.28,14.58 27.305,14.58 31.267,18.542 31.267,18.567 31.496,18.796 v1(31.496,25.222) ; U1.13 39.675,37.345 39.675,38.278 40.996,39.599 41.605,39.599 43.013,38.19 43.013,29.729 42.291,29.007 v1(41.148,29.007)
  Bottom Layer w0.254: v1(31.496,25.222) 39.98,25.222 41.148,26.391 v1(41.148,29.007)
LED1: R8.2 U1.12 | length 28.4
  Top Layer w0.254: R8.2 30.048,15.505 30.048,16.002 32.075,18.029 32.075,32.279 v1(32.893,33.096) ; U1.12 39.903,35.985 v1(39.903,34.773)
  Bottom Layer w0.254: v1(32.893,33.096) 34.569,34.773 v1(39.903,34.773)
MISO: MCP1.15 U1.16 | length 37.4
  Top Layer w0.254: MCP1.15 27.137,14.986 30.861,18.71 30.861,25.73 v1(30.937,25.806) ; v1(40.513,30.48) 41.545,31.512 41.545,33.366 42.215,34.036 42.215,38.176 41.78,38.611 U1.16
  Bottom Layer w0.254: v1(30.937,25.806) 39.345,25.806 40.411,26.873 40.411,30.378 v1(40.513,30.48)
MOSI: MCP1.14 U1.15 | length 46.4
  Top Layer w0.254: MCP1.14 22.606,13.716 22.591,13.701 22.591,11.521 23.52,10.592 26.975,10.592 28.067,11.684 28.067,13.614 29.261,14.808 30.734,14.808 32.481,16.81 32.481,28.062 v1(32.888,28.468) ; v1(40.767,31.623) 40.767,33.502 41.605,34.34 41.605,37.677 U1.15
  Bottom Layer w0.254: v1(32.888,28.468) 36.596,28.468 39.751,31.623 v1(40.767,31.623)
NetC12_1: C12.1 Prog.5 | length 5
  Top Layer w0.254: C12.1 59.487,32.015 59.498,32.004 Prog.5
NetC13_+: C13.+ D1.C U2.3 | length 23.4
  Top Layer w0.254: D1.C 15.862,27.432 16.904,26.391 22.098,26.391 23.266,25.222 U2.3 24.206,24.13 C13.+
NetC22_1: "R17 NTC.1" C22.1 D7.A IC1.4 R16.1 | length 54.9
  Top Layer w0.254: v1(39.218,56.185) 39.559,56.526 R16.1 ; D7.A 46.355,30.353 IC1.4@48.387,28.321 ; IC1.4@48.492,28.216 48.597,28.321 52.567,28.321 C22.1 52.578,36.83 53.34,37.592
  Bottom Layer w0.254: v1(39.218,56.185) 52.426,42.977 52.426,39.575 52.781,39.219 54.002,39.219 54.254,39.472 56.464,39.472 56.718,39.218 56.718,38.202 56.109,37.592 53.34,37.592
NetD2_A: D2.A R7.1 | length 4.1
  Top Layer w0.254: D2.A R7.1
NetD3_A: D3.A R8.1 | length 4.1
  Top Layer w0.254: D3.A R8.1
NetD4_A: D4.A L1.2 U4.1 | length 13.3
  Top Layer w0.254: L1.2 41.021,15.748 43.119,17.846 U4.1 45.273,17.846 47.117,16.002 D4.A
NetD5_C: D5.C Q1.4 R12.1 | length 12.8
  Top Layer w0.254: D5.C D5.C@48.311,49.835 ; Q1.4 47.93,56.261 47.498,55.829 47.498,51.74 48.311,50.927 D5.C@48.311,49.835 ; R12.1 51.805,51.537 50.013,51.537 D5.C@48.311,49.835
NetD6_C: D6.C L2.PS1 U3.2 | length 37.2
  Top Layer w0.254: D6.C 22.352,50.686 22.352,54.929 L2.PS1 32.93,55.818 34.722,54.026 41.605,54.026 42.545,54.966 42.545,62.058 42.824,62.337 U3.2
NetD7_C: D7.C R19.2 | length 1.5
  Top Layer w0.254: D7.C@46.355,38.978 R19.2@46.355,40.513
NetD8_C: D8.C R20.2 | length 2.4
  Top Layer w0.254: D8.C R20.2
NetE_C1_1: E_C1.1 R2.2 | length 13.8
  Top Layer w0.254: E_C1.1 4.064,19.304 7.493,15.875 7.493,12.319 5.842,10.668 R2.2
NetE_C2_1: "R17 NTC.2" E_C2.1 NTC.2 | length 40.4
  Top Layer w0.254: 53.34,40.132 54.254,39.218 54.254,36.678 53.975,36.398 53.975,25.73 54.61,25.095 59.639,25.095 60.35,24.384 NTC.2
  Bottom Layer w0.254: 53.34,40.132 60.289,47.081 ; 60.289,47.081 60.289,49.494 E_C2.1 61.468,49.588 60.439,48.559 60.439,47.231 60.289,47.081
NetIC1_1: GND.2 IC1.1 NTC.1 | length 17.3
  Top Layer w0.254: IC1.1 55.88,24.384 57.658,22.606 61.595,22.606 ; GND.2 NTC.1@61.722,24.13
NetIC1_2: IC1.2 R18.2 | length 5.2
  Top Layer w0.254: IC1.2 47.701,25.654 47.295,25.248 47.295,23.103 48.503,21.895 R18.2
NetIC1_6: IC1.6 R19.1 | length 17.8
  Top Layer w0.254: IC1.6 44.069,26.924 44.069,32.131 44.45,32.512 44.45,41.021 45.974,42.545 R19.1@46.228,42.545
NetIC1_7: IC1.7 R20.1 | length 77.3
  Top Layer w0.254: R20.1 v1(5.334,42.799) ; IC1.7 42.418,25.654 42.037,25.273 42.037,23.368 43.078,23.368 v1(43.104,23.393)
  Bottom Layer w0.254: v1(5.334,42.799) 5.334,46.152 5.309,46.126 4.966,46.469 4.966,46.527 4.122,47.371 3.2,47.371 2.896,47.676 2.896,49.682 8.839,49.682 26.218,32.304 41.199,32.304 41.54,31.962 41.54,29.605 43.104,28.042 v1(43.104,23.393)
NetMCP1_1: MCP1.1 MCP2.1 | length 13.4
  Top Layer w0.254: MCP2.1 12.446,11.557 13.97,13.081 16.815,13.081 17.094,13.36 17.094,18.339 16.637,18.796 MCP1.1
NetMCP1_2: MCP1.2 MCP2.4 | length 15.1
  Top Layer w0.254: MCP2.4 8.636,9.144 9.017,8.763 10.541,8.763 10.541,14.478 13.589,17.526 MCP1.2
NetMCP1_17: MCP1.17 R1.2 | length 3.2
  Top Layer w0.254: MCP1.17 26.137,17.526 26.402,17.261 R1.2
NetMCP2_8: MCP2.8 R5.2 | length 4.1
  Top Layer w0.254: MCP2.8 12.446,5.334 12.573,5.207 R5.2
NetR13_2: "R13 BOOST.2" U4.3 | length 17.8
  Top Layer w0.254: U4.3 51.501,19.746 52.68,18.567 52.68,11.659 51.943,10.922
RESET: C7.2 C12.2 R6.1 R9.2 S1.1 U1.29 | length 97.6
  Top Layer w0.254: S1.1 10.287,66.675 12.562,64.4 C7.2 15.585,64.4 ; v1(16.535,54.077) 16.535,63.449 ; v1(33.172,43.942) 33.172,42.716 U1.29 ; R6.1 R9.2@56.693,28.332 ; v1(56.134,38.813) 56.134,30.734 56.653,30.215 C12.2@56.693,30.215 ; R9.2 C12.2 ; 15.585,64.4 16.535,63.449 ; 15.585,64.4 15.596,64.4 16.535,63.46 16.535,63.449
  Bottom Layer w0.254: v1(16.535,54.077) 35.103,54.077 ; v1(33.172,43.942) 37.109,47.879 39.243,47.879 39.37,48.006 39.37,49.809 ; v1(56.134,38.813) 50.366,38.813 39.37,49.809 ; 35.103,54.077 38.354,54.077 39.37,53.061 39.37,49.809 ; 35.103,54.077 39.37,49.809
RXP: Prog.4 U1.31 | length 32.8
  Top Layer w0.254: U1.31 v1(33.544,40.081)
  Bottom Layer w0.254: v1(33.544,40.081) 35.103,40.081 35.783,40.762 38.105,40.762 44.323,34.544 Prog.4
SCK: MCP1.13 U1.17 | length 99.7
  Top Layer w0.254: v1(23.241,13.081) 23.876,12.446 MCP1.13@23.749,12.446 ; U1.17 41.78,40.542 43.688,38.633 v1(43.688,33.452)
  Bottom Layer w0.254: v1(23.241,13.081) 19.304,13.081 16.231,10.008 16.231,6.198 19.939,2.489 55.423,2.489 56.363,3.429 56.363,23.012 45.923,33.452 v1(43.688,33.452)
SCL: P1.3 R3.1 U1.28 | length 40.5
  Top Layer w0.254: P1.3 5.08,47.244 10.53,47.244 11.684,48.398 R3.1 12.827,48.398 v1(12.827,47.498) ; U1.28 34.646,42.374 v1(34.646,39.218)
  Bottom Layer w0.254: v1(12.827,47.498) 12.827,46.914 13.157,46.584 19.837,46.584 27.605,38.816 34.244,38.816 v1(34.646,39.218)
SDA: P1.4 R4.1 U1.27 | length 41
  Top Layer w0.254: P1.4 9.79,42.788 11.822,42.788 ; v1(12.065,47.498) 12.014,47.498 11.303,46.787 11.303,43.307 11.822,42.788 ; R4.1 11.822,42.788 ; v1(28.372,40.234) 32.71,44.572 33.579,44.572 U1.27
  Bottom Layer w0.254: v1@12.161,47.645 12.161,47.721 12.543,48.103 20.502,48.103 v1(28.372,40.234)
SOS: P1.8 U1.23 | length 66.8
  Top Layer w0.254: U1.23 38.786,44.408 38.735,44.459 38.735,44.705 38.763,44.733 38.763,48.74 v1(38.735,48.768)
  Bottom Layer w0.254: P1.8 6.477,36.093 5.817,35.433 3.048,35.433 2.083,36.398 2.083,50.47 2.591,50.978 22.758,50.978 24.968,48.768 v1(38.735,48.768)
TXP: Prog.3 U1.30 | length 32.3
  Top Layer w0.254: U1.30 v1(33.869,40.888)
  Bottom Layer w0.254: v1(33.869,40.888) 34.919,40.888 35.199,41.168 39.012,41.168 43.934,36.246 61.976,36.246 Prog.3
XTAL1: C8.2 U1.7 Y1.1 | length 11.3
  Top Layer w0.254: U1.7 33.655,33.621 C8.2 35.565,27.178 Y1.1
XTAL2: C9.1 U1.8 Y1.3 | length 13.3
  Top Layer w0.254: U1.8 35.814,34.7 35.814,34.671 38.608,31.877 38.608,26.543 37.695,25.63 Y1.3 37.8,25.273 39.9,25.273 C9.1
pads on no net: MCP1.3 MCP1.4 MCP1.5 MCP1.6 MCP1.10 MCP1.11 MCP2.5 P1.7 Prog.6 U1.9 U1.10 U1.11 U1.19 U1.22 U4.6

## Polygon pours and split planes (outlines as drawn)
GND on Top Layer "GND TOP PLANE" (solid, pour order 14): -5.588,71.755 69.596,71.755 74.422,66.929 73.279,65.786 73.279,-3.429 -13.081,-3.429 -13.335,-3.683
GND on Bottom Layer "GND BOTTOM PLANE" (solid, pour order 16): -4.318,74.041 -3.302,75.057 84.201,75.057 84.201,-3.429 76.581,-11.049 73.406,-7.874 -11.303,-7.874

## Silkscreen, mask and mechanical layers (free items; w line width, h text height)
Top Overlay:
  text "NTC" at 60.96,52.451 h0.38
  text "5V" at 58.674,41.91 h0.76
  text "GND" at 58.039,39.243 h0.76
  text "TX" at 58.547,36.703 h0.76
  text "Standby" at 48.641,34.417 h0.76 r90
  text "RX" at 58.547,34.036 h0.76
  text "DTR" at 58.039,31.496 h0.76
  text "Carga" at 7.747,25.908 h0.76 r90
  text "CAN" at 2.413,19.939 h0.51 r90
  text "EMG" at 28.829,4.191 h0.76
  text "ON" at 33.02,4.191 h0.76
Mechanical 2:
  the board outline again, w0.254

## Text inside footprints (layer, text, board x,y; h text height)
P1: Bottom Overlay "1" at 3.429,50.419 h1 r270; Bottom Overlay "2" at 5.969,50.165 h1 r270; Bottom Overlay "7" at 3.429,38.608 h1 r270; Bottom Overlay "8" at 5.842,38.608 h1 r270